# EAGLE board ECD (EAGLE 9.6.0)
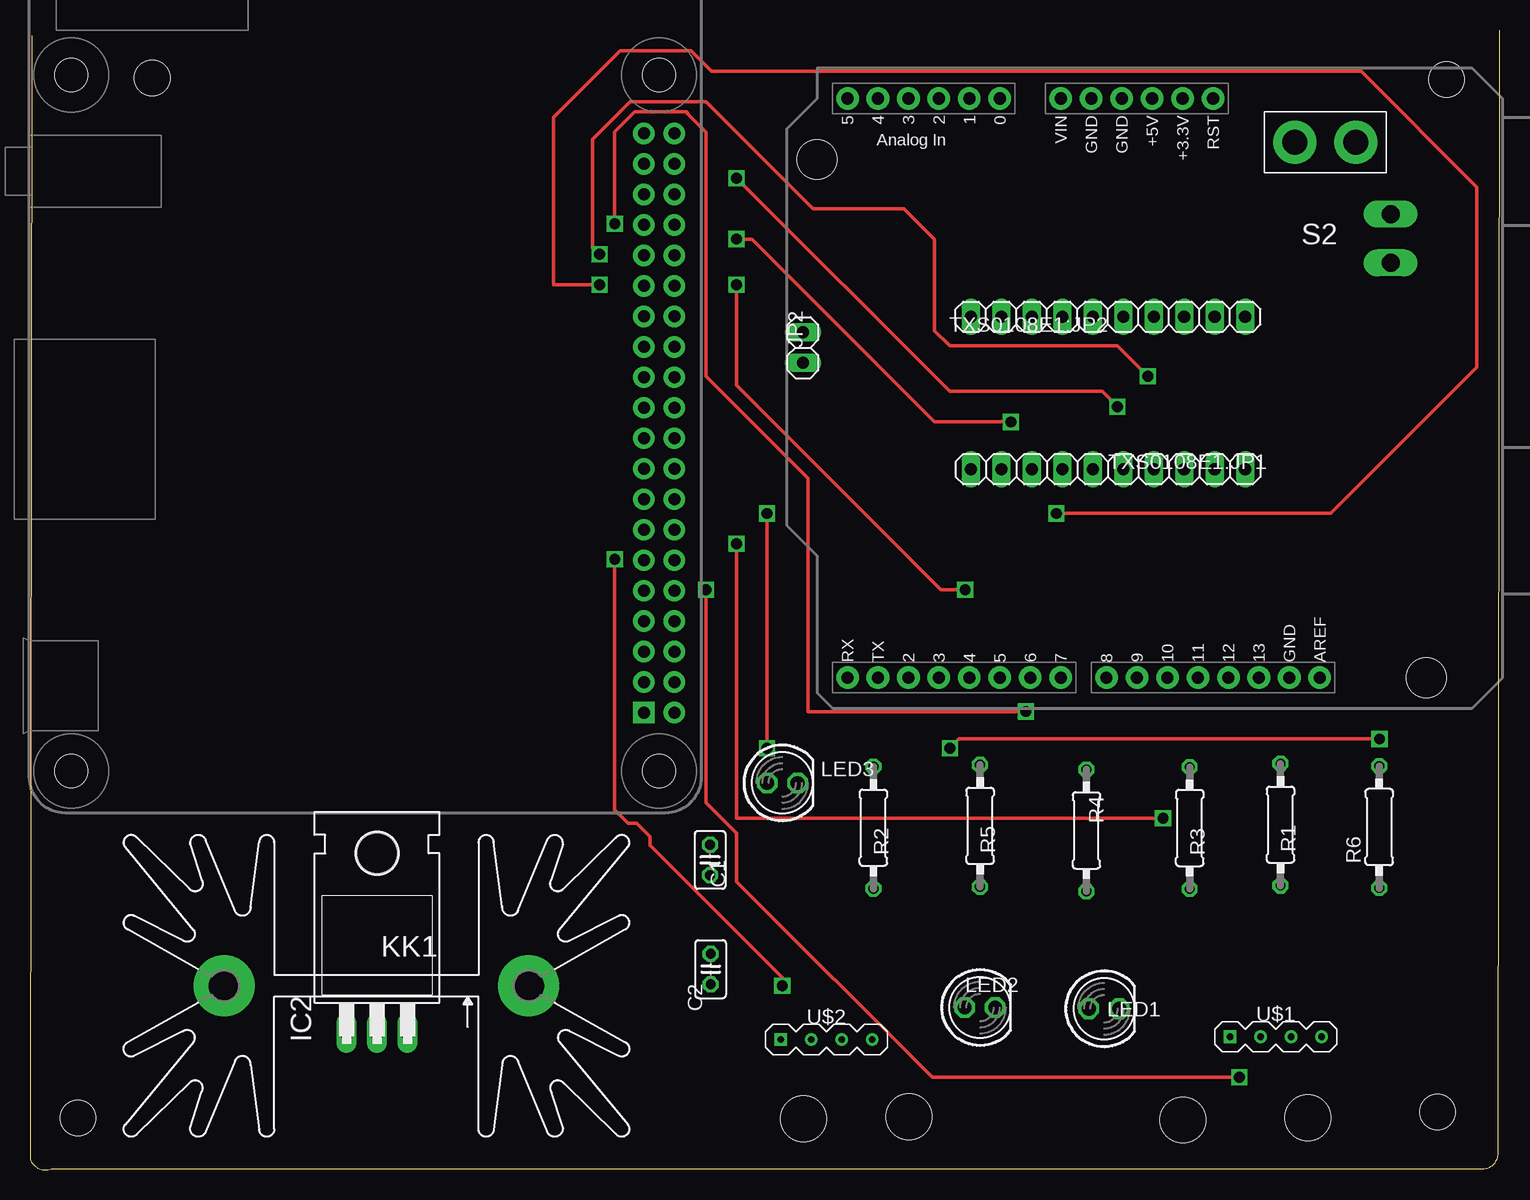
[diagram p0: board, top side]
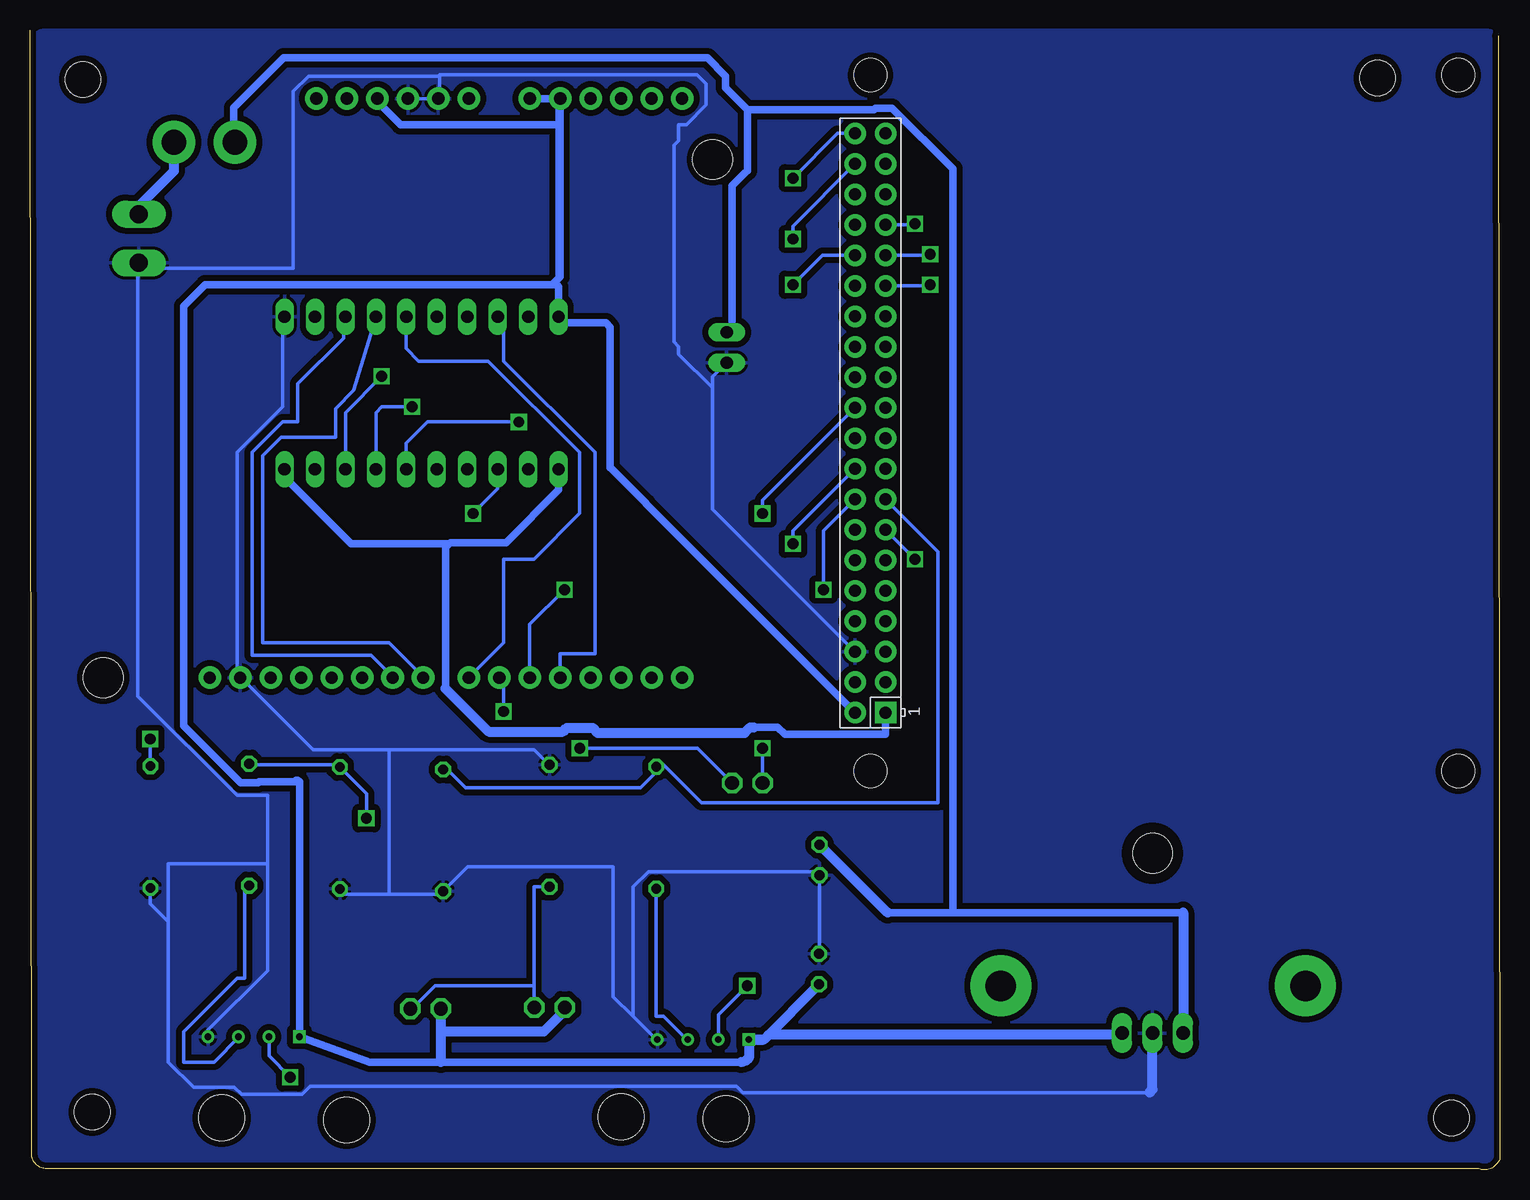
[diagram p1: board, bottom side, seen from below]

Size 122.51 x 94.98 mm. Coordinates in mm from the lower left corner, seen from the top.
Outline: 122.51,94.98 122.38,1.36 arc-90 121.11,0.09 1.75,0.09 arc-90 0,0.88 0.13,94.5
Copper layers (1*16): Top 0.035mm / dielectric 1.5mm / Bottom 0.035mm
Design rules "542 *": minimum track width 12mil, minimum drill 0.5mm, track to track 0.5mm, track to pad 0.6mm, pad to pad 0.6mm, via to via 0.6mm, smd to smd 0mil, copper to edge 0.5mm, drill to drill 0.6mm, minimum pad ring 10mil, minimum via ring 8mil, stop-mask expansion 4mil, vias tented up to drill 0mil, thermal gap 10mil
Holes 2.95 mm at 4.01,4.33 10.19,91 118.08,90.87 117.32,4.81
Holes 3.81 mm at 106.53,4.32 96.11,4.15 64.49,4.24 73.25,4.41

## Footprints (pad centres in the part's own frame; a part is rotated, then mirrored left to right if it is on the bottom)
C025-025X050 = drill 0.813 octagon: 1 -1.27,0; 2 1.27,0
TO220H = drill 1.118 long: 1 -2.54,-10.16; 2 0,-10.16; 3 2.54,-10.16 | hole 3.302: 0,4.826
1X02 = drill 1.016 long: 1 -1.27,0; 2 1.27,0
1X02_XTRA_BIG = drill 2.057 pad 3.556: 1 -2.54,0; 2 2.54,0
SK129 = drill 2.54 pad 5.08: A2,5 -12.7,-0.889; B2,5 12.7,-0.889
LED5MM = drill 1.143 octagon: A -1.27,0; K 1.27,0
RASPI_BOARD_B+_FULL = drill 1 pad 1.778 square: 1 8.37,51.23 | drill 1 pad 1.778: 2 8.37,53.77; 3 10.91,51.23; 4 10.91,53.77; 5 13.45,51.23; 6 13.45,53.77; 7 15.99,51.23; 8 15.99,53.77; 9 18.53,51.23; 10 18.53,53.77; 11 21.07,51.23; 12 21.07,53.77; 13 23.61,51.23; 14 23.61,53.77; 15 26.15,51.23; 16 26.15,53.77; 17 28.69,51.23; 18 28.69,53.77; 19 31.23,51.23; 20 31.23,53.77; 21 33.77,51.23; 22 33.77,53.77; 23 36.31,51.23; 24 36.31,53.77; 25 38.85,51.23; 26 38.85,53.77; 27 41.39,51.23; 28 41.39,53.77; 29 43.93,51.23; 30 43.93,53.77; 31 46.47,51.23; 32 46.47,53.77; 33 49.01,51.23; 34 49.01,53.77; 35 51.55,51.23; 36 51.55,53.77; 37 54.09,51.23; 38 54.09,53.77; 39 56.63,51.23; 40 56.63,53.77 | hole 2.75: 3.5,3.5; 3.5,52.5; 61.5,3.5; 61.5,52.5
0207/10 = drill 0.813 octagon: 1 -5.08,0; 2 5.08,0
MS243 = drill 1.499 pad 1.524 long: 1 0,-2.032; 2 0,2.032
1X10 = drill 1.016 long: 1 -11.43,0; 2 -8.89,0; 3 -6.35,0; 4 -3.81,0; 5 -1.27,0; 6 1.27,0; 7 3.81,0; 8 6.35,0; 9 8.89,0; 10 11.43,0
DUEMILANOVE_SHIELD = drill 1.016 pad 1.88: 3.3V 50.8,26.67; 5V 50.8,29.21; A0 50.8,41.91; A1 50.8,44.45; A2 50.8,46.99; A3 50.8,49.53; A4 50.8,52.07; A5 50.8,54.61; AREF 2.54,15.24; D2 2.54,49.53; D3 2.54,46.99; D4 2.54,44.45; D5 2.54,41.91; D6 2.54,39.37; D7 2.54,36.83; D8 2.54,33.02; D9 2.54,30.48; D10 2.54,27.94; D11 2.54,25.4; D12 2.54,22.86; D13 2.54,20.32; GND@0 50.8,31.75; GND@1 50.8,34.29; GND@2 2.54,17.78; RES 50.8,24.13; RX 2.54,54.61; TX 2.54,52.07; VIN 50.8,36.83 | hole 3.302: 45.72,57.15; 2.54,6.35
ULTRASONIC-HC-SR04 = drill 0.55 square: 1 -3.81,-1.27 | drill 0.55: 2 -1.27,-1.27; 3 1.27,-1.27; 4 3.81,-1.27

## Placement (x,y rotation side)
C1  330n  [C025-025X050]  56.69,25.82 270 top
C2  100n  [C025-025X050]  56.74,16.73 90 top
IC2  7805T  [TO220H]  28.93,21.55 0 top
JP2  [1X02]  64.43,68.52 90 top
JP7  SHIELD_PWR  [1X02_XTRA_BIG]  107.98,85.64 0 top
KK1  SK129-PAD  [SK129]  28.88,14.44 180 top
LED1  [LED5MM]  89.54,13.42 0 top
LED2  [LED5MM]  79.2,13.53 0 top
LED3  [LED5MM]  62.71,32.24 0 top
PI  RASPI_BOARD_B+_F  [RASPI_BOARD_B+_FULL]  -0.05,29.73 90 bottom
R1  1k  [0207/10]  104.24,28.77 270 top
R2  1k  [0207/10]  70.31,28.51 270 top
R3  2k  [0207/10]  96.67,28.49 270 top
R4  2k  [0207/10]  88.06,28.28 270 top
R5  10  [0207/10]  79.2,28.66 270 top
R6  100  [0207/10]  112.47,28.56 90 top
S2  [MS243]  113.44,77.61 180 top
TXS0108E1:JP1  [1X10]  89.87,58.38 0 top
TXS0108E1:JP2  [1X10]  89.87,71.08 180 top
U3  ARDUINO_SHIELDLABEL  [DUEMILANOVE_SHIELD]  122.76,38.47 90 top
U$1  ULTRASONIC-HC-SR04  [ULTRASONIC-HC-SR04]  103.86,12.36 0 top
U$2  ULTRASONIC-HC-SR04  [ULTRASONIC-HC-SR04]  66.4,12.13 0 top

## Library data of the parts
C1 C2 = rcl; SPICEPREFIX: C
IC2 = linear
JP2 TXS0108E1:JP1 TXS0108E1:JP2 = pinhead
JP7 U3 = SparkFun
KK1 = heatsink
LED1-LED3 = ledMe
PI = raspberrypi_bastelstube_v13
R1-R6 = resistor
S2 = switch2
U$1 U$2 = diy-modules

## Nets
0: C1.2 C2.2 IC2.2 JP2.1 PI.6 R3.2 R4.2 R5.1 R6.1 S2.2 TXS0108E1:JP2.1 U3.GND@0 U3.GND@1 U3.GND@2 U$1.4 U$2.4
L_BCK: PI.40 TXS0108E1:JP1.7
L_FWD: PI.38 TXS0108E1:JP1.6
L_SPD: PI.32 U3.D5
L_US_ECHO: PI.18 R1.1 R3.1
L_US_TRIG: PI.16 U$1.2
N$1: R1.2 U$1.3
N$2: R2.2 U$2.3
N$4: LED3.A PI.22
N$5: LED1.K LED2.K R5.2
N$6: LED3.K R6.2
N$7: JP7.2 S2.1
N$13: TXS0108E1:JP2.8 U3.D4
N$14: TXS0108E1:JP2.5 U3.D7
N$15: TXS0108E1:JP2.4 U3.D8
N$16: TXS0108E1:JP2.3 U3.D9
PI_3V3: PI.1 TXS0108E1:JP1.1 TXS0108E1:JP1.10
PI_5V: C2.1 IC2.3 LED1.A LED2.A PI.2 TXS0108E1:JP2.10 U3.5V U3.A0 U3.A1 U$1.1 U$2.1
PWR+: C1.1 IC2.1 JP2.2 JP7.1
R_BCK: PI.31 TXS0108E1:JP1.8
R_FWD: PI.29 TXS0108E1:JP1.3
R_SPD: PI.33 U3.D6
R_US_ECHO: PI.15 R2.1 R4.1
R_US_TRIG: PI.13 U$2.2
TXS0108E1:A1: TXS0108E1:JP1.2
TXS0108E1:A3: TXS0108E1:JP1.4
TXS0108E1:A4: TXS0108E1:JP1.5
TXS0108E1:A8: TXS0108E1:JP1.9
TXS0108E1:B1: TXS0108E1:JP2.9
TXS0108E1:B3: TXS0108E1:JP2.7
TXS0108E1:B4: TXS0108E1:JP2.6
TXS0108E1:B8: TXS0108E1:JP2.2

## Tracks (layer width: path | path; a pad name or v marks a point on that pad's centre or on a via)
0
  Bottom 0.305: 72.24,12.79 70.33,10.88 U$2.4 | 72.24,12.79 72.24,23.58 70.97,24.85 57,24.85 C1.2 56.69,18.05 C2.2 | 92.56,22.95 96.37,22.95 R3.2 | 92.56,22.95 88.11,22.95 R4.2 86.03,25.23 73.89,25.23 73.89,14.44 72.24,12.79 | 92.56,35.01 98.91,35.01 104.62,40.73 U3.GND@2 105.26,41.36 105.26,59.78 101.45,63.59 101.45,70.57 TXS0108E1:JP2.1 | 92.56,35.01 80.49,35.01 79.22,33.74 R5.1 | 92.56,35.01 92.56,22.95 | PI.6 53.82,43.27 65.61,55.05 65.61,65.16 | 102.72,25.49 102.72,31.2 105.26,31.2 113.51,39.46 113.51,75.12 113.39,75.12 100.56,75.12 100.56,89.88 99.29,91.15 88.37,91.15 | 102.72,25.49 102.72,16.6 107.71,11.61 U$1.4 | 110.97,20.66 110.97,25.49 102.72,25.49 | 110.97,20.66 110.97,8.98 108.87,6.88 105.47,6.88 104.87,6.28 99.83,6.28 99.14,6.96 63.6,6.96 63.08,6.44 29.18,6.44 28.96,6.44 28.91,6.49 | R6.1 112.47,22.16 110.97,20.66 | 65.61,65.16 68.43,67.98 68.43,68.6 68.83,69 68.83,85.37 68.43,85.76 68.43,87.08 67.79,87.08 66.14,88.73 66.14,90.52 66.9,91.27 88.37,91.27 88.37,91.15 | 65.61,65.16 65.61,66.07 JP2.1 | 88.37,91.15 88.37,89.37 U3.GND@1 U3.GND@0
  Bottom 0.813: S2.2 113.44,75.17 113.39,75.12 | 29.18,6.44 28.93,6.69 IC2.2
  pour Bottom: 1.15,94.98 121.25,94.98 arc-90 122.38,93.86 122.38,1.17 arc-90 121.36,0.15 1.74,0.15 arc-90 0,1.9 0,93.83 arc-90
L_BCK  (via drill 0.9)
  Top 0.305: v58.9,82.64 76.68,64.86 89.38,64.86 v90.65,63.59
  Bottom 0.305: PI.40 55.18,86.36 v58.9,82.64 | v90.65,63.59 93.19,63.59 93.68,63.11 TXS0108E1:JP1.7
L_FWD  (via drill 0.9)
  Top 0.305: v58.9,77.56 60.17,77.56 75.41,62.32 v81.76,62.32
  Bottom 0.305: PI.38 58.9,78.64 v58.9,77.56 | v81.76,62.32 89.38,62.32 91.14,60.57 TXS0108E1:JP1.6
L_SPD  (via drill 0.9)
  Top 0.305: v58.9,73.75 58.9,65.37 75.92,48.35 v77.95,48.35
  Bottom 0.305: PI.32 56.45,76.2 v58.9,73.75 | v77.95,48.35 80.85,45.45 U3.D5
L_US_ECHO  (via drill 0.9)
  Top 0.305: v58.9,52.16 58.9,29.3 v94.46,29.3
  Bottom 0.305: R1.1 103.99,33.74 97,33.74 R3.1 94.46,31.36 v94.46,29.3 | v58.9,52.16 58.9,53.24 PI.18
L_US_TRIG  (via drill 0.9)
  Top 0.305: v56.36,48.35 56.36,30.57 58.9,28.03 58.9,24.02 75.22,7.71 v100.81,7.71
  Bottom 0.305: PI.16 56.36,53.24 v56.36,48.35 | v100.81,7.71 102.59,9.49 U$1.2
N$1
  Bottom 0.305: R1.2 104.62,23.58 104.62,15.96 105.26,15.96 109.7,11.52 109.7,8.98 107.16,8.98 105.06,11.08 U$1.3
N$2
  Bottom 0.305: R2.2 70.33,22.95 70.33,12.79 69.7,12.79 67.79,10.88 U$2.3
N$4  (via drill 0.9)
  Top 0.305: v61.44,54.7 v61.44,35.14
  Bottom 0.305: PI.22 61.44,55.78 v61.44,54.7 | v61.44,35.14 LED3.A
N$5
  Bottom 0.305: 80.49,15.33 80.49,23.58 R5.2 | 80.49,15.33 80.49,14.06 LED2.K | 80.49,15.33 88.75,15.33 90.65,13.42 LED1.K
N$6  (via drill 0.9)
  Top 0.305: v112.5,35.9 77.44,35.9 v76.68,35.14
  Bottom 0.305: R6.2 112.47,35.88 v112.5,35.9 | v76.68,35.14 66.88,35.14 LED3.K
N$7
  Bottom 0.813: JP7.2 110.52,83.22 113.44,80.3 S2.1
N$13
  Bottom 0.305: U3.D4 78.31,43.01 75.41,43.01 75.41,59.78 83.03,67.4 83.03,70.57 TXS0108E1:JP2.8
N$14
  Bottom 0.305: U3.D7 83.03,43.9 83.03,50.89 80.49,50.89 76.68,54.7 76.68,59.78 84.3,67.4 90.11,67.4 91.14,68.47 TXS0108E1:JP2.5
N$15
  Bottom 0.305: U3.D8 90.02,41.36 92.56,43.9 103.1,43.9 103.1,59.52 101.57,61.05 97.02,61.05 97.02,63.44 95.52,64.94 TXS0108E1:JP2.4
N$16
  Bottom 0.305: TXS0108E1:JP2.3 96.37,70.57 96.37,69.3 100.18,65.49 100.18,62.32 101.45,62.32 103.99,59.78 103.99,42.89 94.08,42.89 92.56,41.36 U3.D9
PI_3V3
  Bottom 0.61: 62.2,36.87 60.18,36.87 59.59,36.28 51.18,36.28 PI.1 | 87.87,40.1 87.87,51.87 87.58,52.16 | 87.58,52.16 95.73,52.16 101.3,57.72 TXS0108E1:JP1.10 | 87.58,52.16 87.46,52.27 82.84,52.27 78.44,56.67 TXS0108E1:JP1.1
  Bottom 0.813: 87.87,40.1 84.28,36.51 78.09,36.51 77.77,36.82 75.59,36.82 75.18,36.41 62.95,36.41 62.48,36.87 62.2,36.87
PI_5V
  Bottom 0.305: 78.59,87.08 78.59,88.99 U3.A1 | 78.59,87.08 78.59,73.75 78.59,71.21 TXS0108E1:JP2.10 | 71.15,55.51 74.14,58.51 74.14,58.56 74.14,70.22 | 78.59,87.08 91.29,87.08 | 100.18,32.47 100.3,32.47
  Bottom 0.61: 60.95,11.25 61.32,10.88 | 63.22,8.98 88.24,8.98 94.18,8.98 U$1.1 100.05,32.35 100.18,32.47 | 100.3,32.47 100.43,32.35 103.41,32.35 103.51,32.25 104.95,32.25 109.7,37 109.7,71.97 107.92,73.75 78.97,73.75 | 78.97,73.75 78.59,73.75 78.44,73.6 TXS0108E1:JP2.10 77.95,70.6 77.95,70.57 74.5,70.57 74.14,70.22 74.14,58.51 | 78.97,73.75 78.31,74.41 78.31,86.96 | 78.31,86.96 U3.A1 U3.A0 | 78.31,86.96 78.44,87.08 91.29,87.08 91.62,87.08 93.55,89.01 U3.5V | PI.2 53.73,38.1 71.15,55.51 71.15,55.56 74.14,58.56
  Bottom 0.813: 61.32,10.88 61.36,10.84 61.37,10.86 U$2.1 | U$2.1 62.59,9.33 62.81,9.11 63.22,8.98 | 60.95,11.25 31.61,11.25 IC2.3 | LED1.A 88.26,11.52 | 88.26,11.52 88.26,9 88.24,8.98 | LED2.A 77.93,13.27 79.68,11.52 88.26,11.52 | C2.1 61.34,10.86 U$2.1
PWR+
  Bottom 0.305: 62.71,83.27 62.9,83.08
  Bottom 0.61: 62.71,88.35 62.71,83.27 | 62.9,83.08 63.98,82 63.98,70.23 JP2.2 | 62.71,88.35 52.17,88.35 52.04,88.48 50.65,88.48 45.57,83.4 45.57,21.42 | 26.37,21.42 45.57,21.42 | 45.57,21.42 51.03,21.42 | 62.71,88.35 64.52,90.16 64.52,91.14 66.05,92.66 101.35,92.66 105.51,88.51 105.51,85.71 JP7.1
  Bottom 0.813: 51.03,21.42 C1.1 | 26.37,21.42 26.37,11.42 IC2.1
R_BCK  (via drill 0.9)
  Top 0.305: v47.47,76.29 46.91,76.85 46.91,85.88 50.01,88.99 56.36,88.99 65.25,80.1 72.87,80.1 75.41,77.56 75.41,69.94 76.68,68.67 90.65,68.67 v93.19,66.13
  Bottom 0.305: PI.31 47.56,76.2 v47.47,76.29 | v93.19,66.13 96.22,63.11 TXS0108E1:JP1.8
R_FWD  (via drill 0.9)
  Top 0.305: v47.47,73.75 43.66,73.75 43.66,87.72 49.2,93.26 55.09,93.26 56.82,91.53 110.97,91.53 120.62,81.88 120.62,66.89 108.43,54.7 v85.57,54.7
  Bottom 0.305: PI.29 47.56,73.66 v47.47,73.75 | v85.57,54.7 83.52,56.76 TXS0108E1:JP1.3
R_SPD  (via drill 0.9)
  Top 0.305: v48.74,78.83 48.74,86.48 50.41,88.16 54.74,88.16 54.79,88.1 54.71,88.1 56.36,86.45 56.36,66.13 64.85,57.64 64.85,38.19 v83.03,38.19
  Bottom 0.305: PI.33 48.83,78.74 v48.74,78.83 | v83.03,38.19 83.03,40.65 U3.D6
R_US_ECHO
  Bottom 0.305: R4.1 87.48,33.11 86.21,31.84 71.6,31.84 70.33,33.11 R2.1 69.7,33.74 66.52,30.57 46.84,30.57 46.84,51.52 50.65,55.33 PI.15
R_US_TRIG  (via drill 0.9)
  Top 0.305: v48.74,50.89 48.74,29.98 49.83,28.89 50.55,28.89 51.7,27.74 51.7,27.03 62.71,16.01 v62.71,15.33
  Bottom 0.305: PI.13 51.18,53.33 v48.74,50.89 | v62.71,15.33 65.13,12.92 U$2.2